# Altium PCB RPI_LP_motor_hat.PcbDoc
Units mm, origin at the board's own origin, x right, y up, seen from the top; angles counter-clockwise.
Board outline 64.99 x 56 mm, 2 copper layers (Top Layer, Bottom Layer); 84 components, 64 nets, 330 pads, 138 vias.
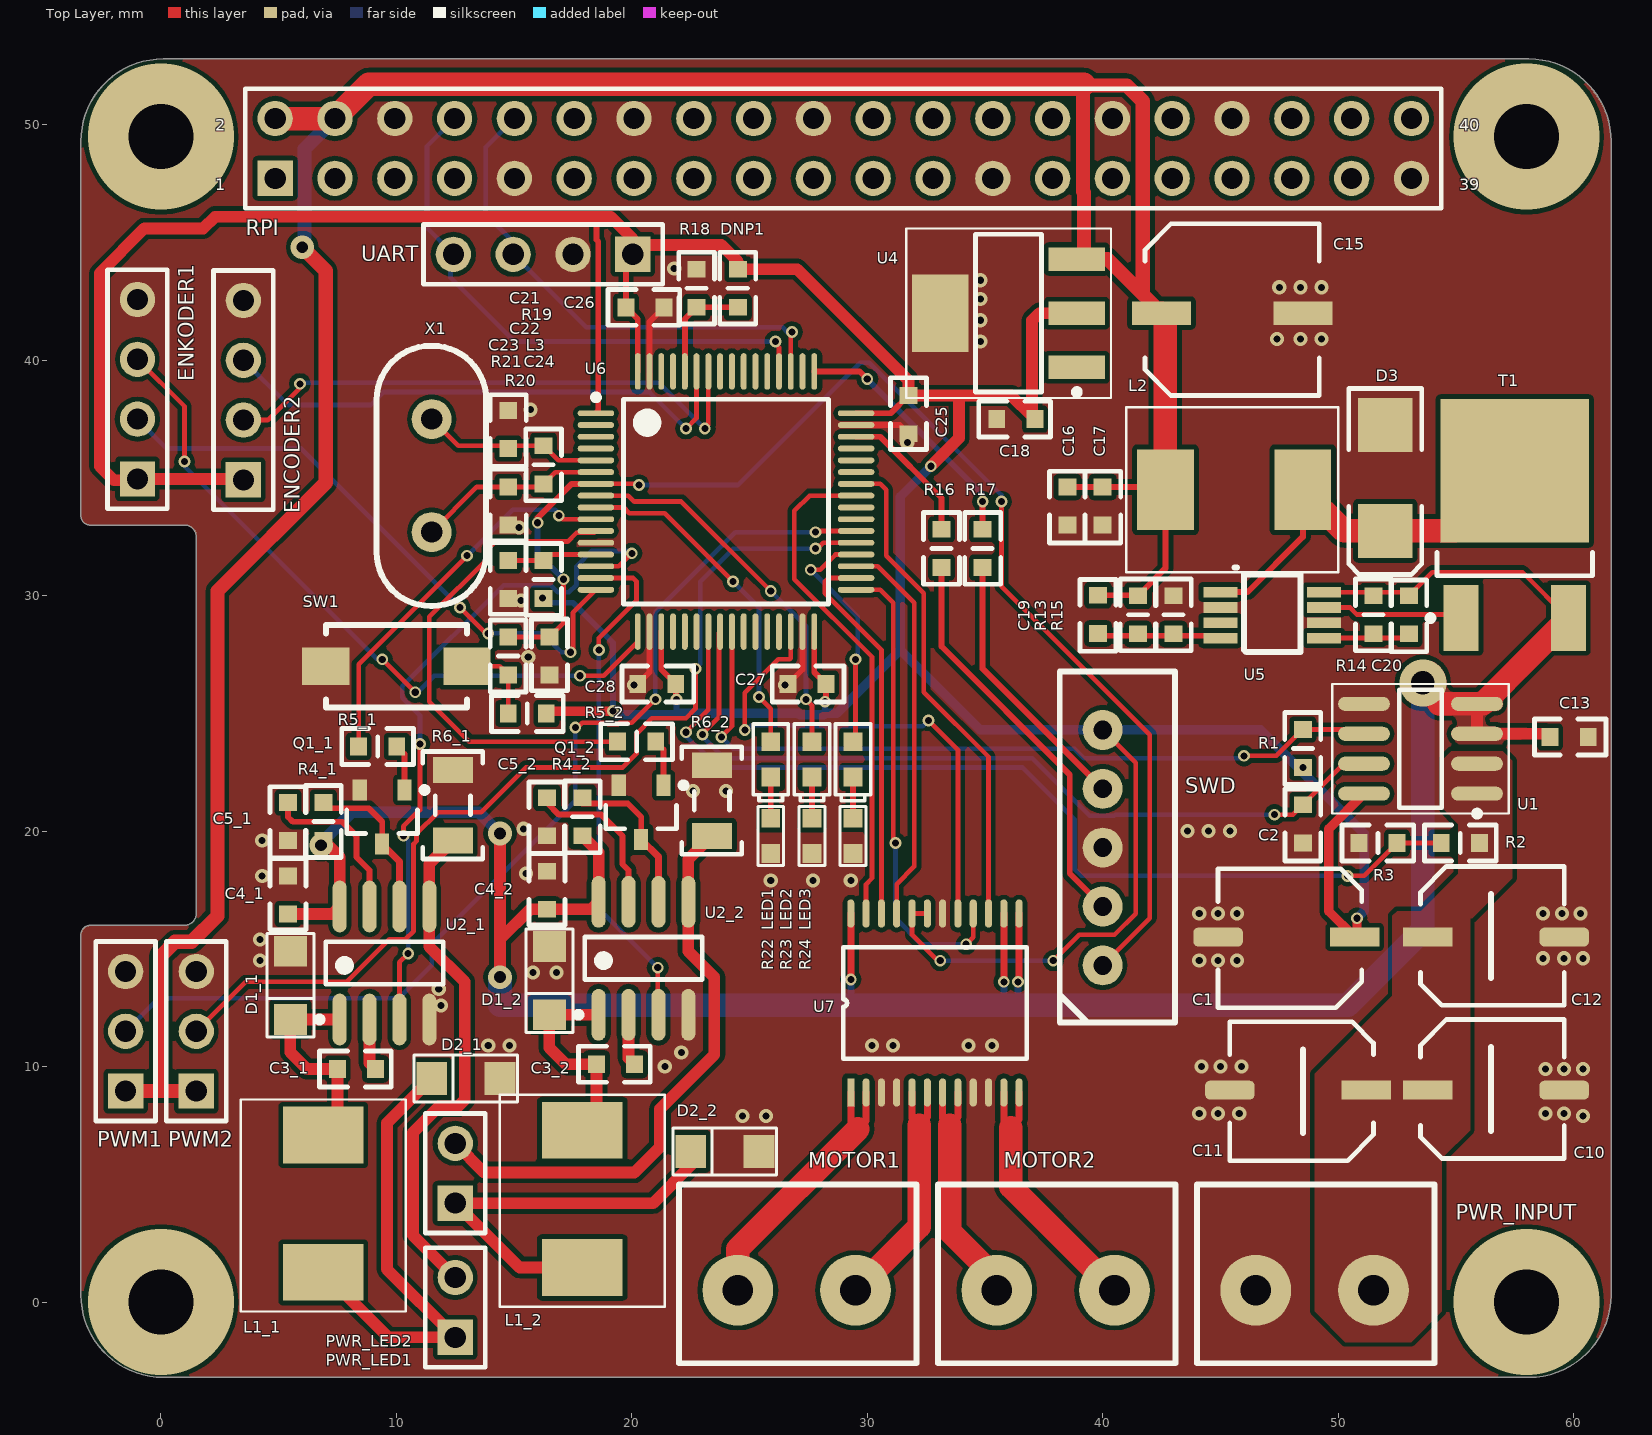
[diagram p0: Top Layer view]
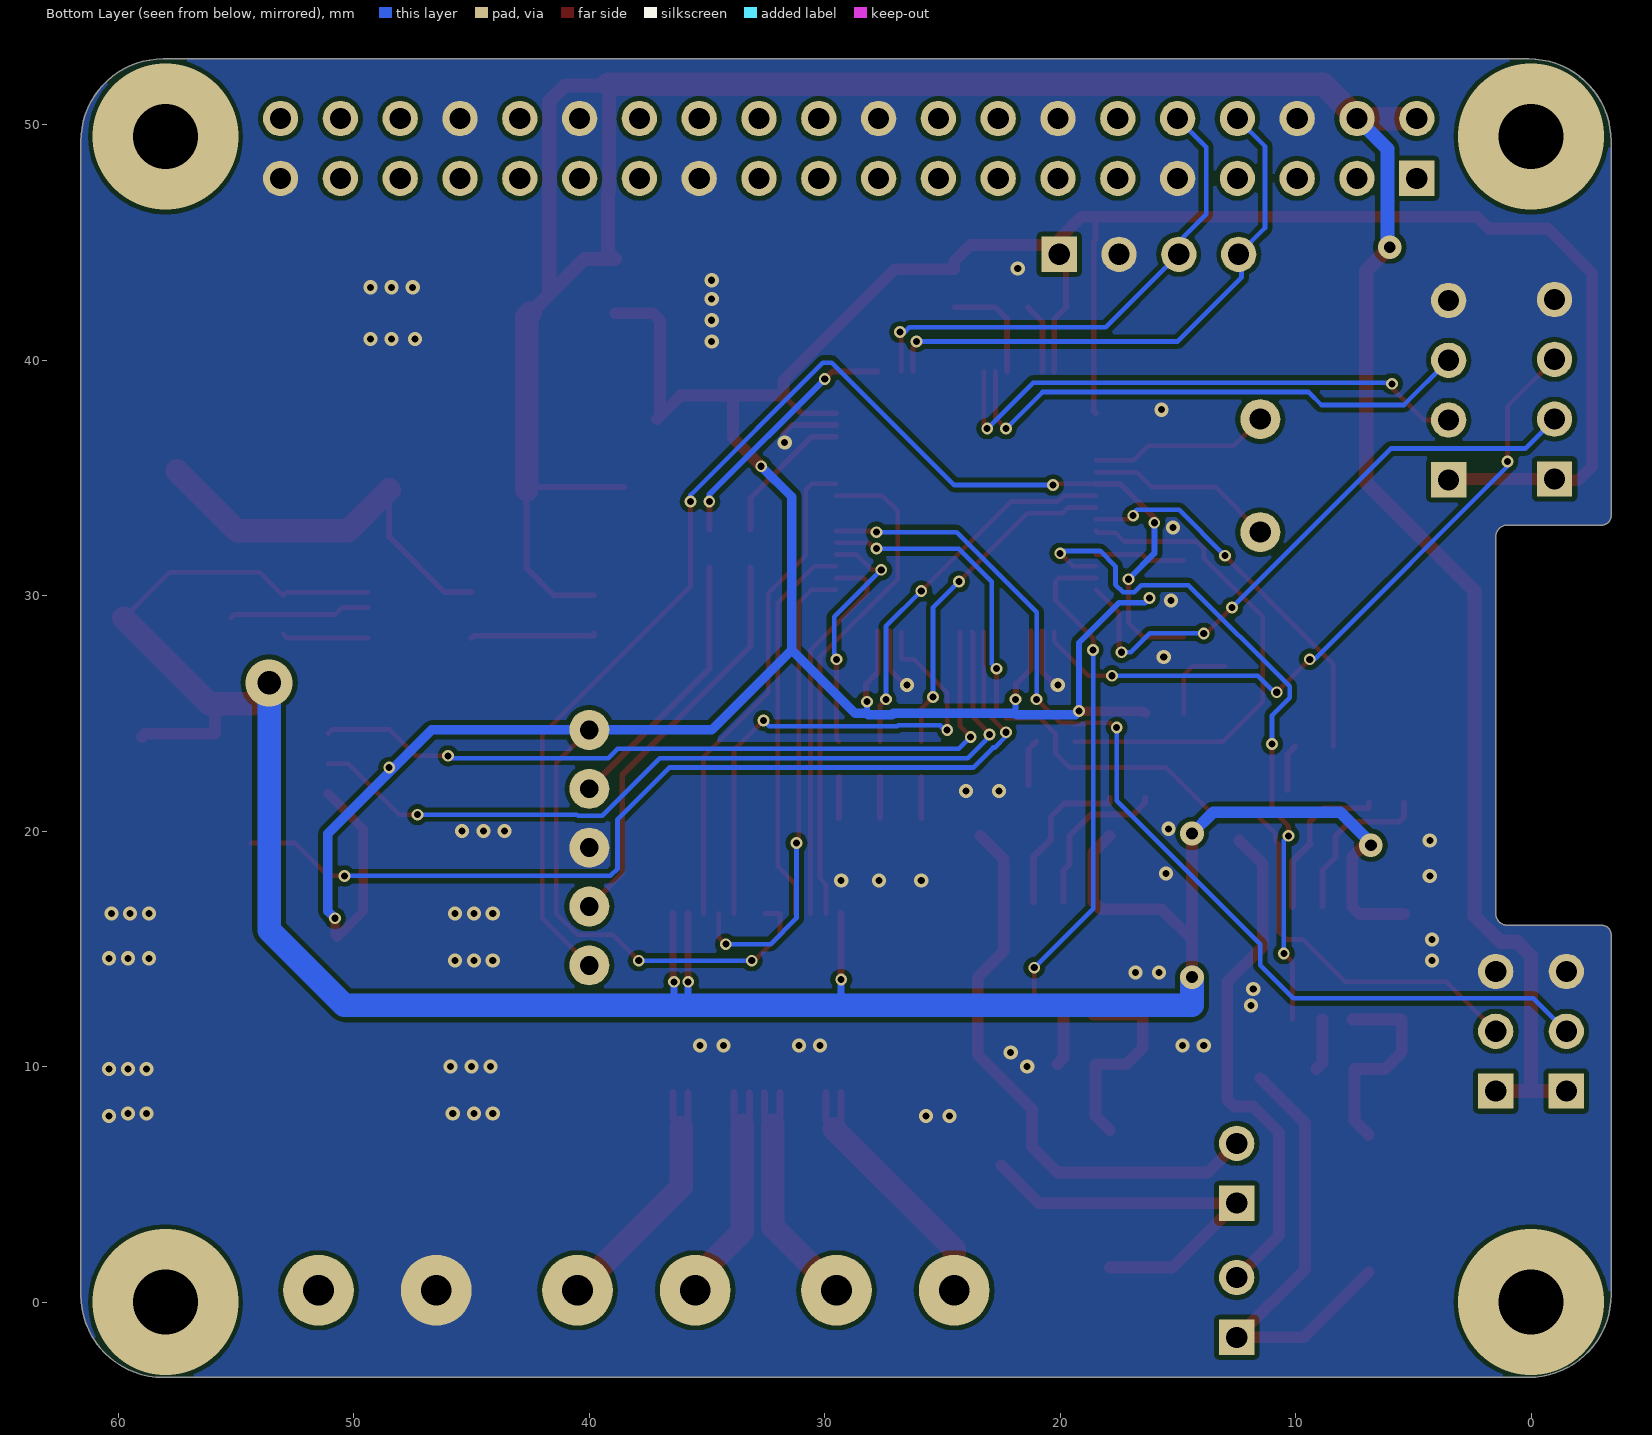
[diagram p1: Bottom Layer view, seen from below]
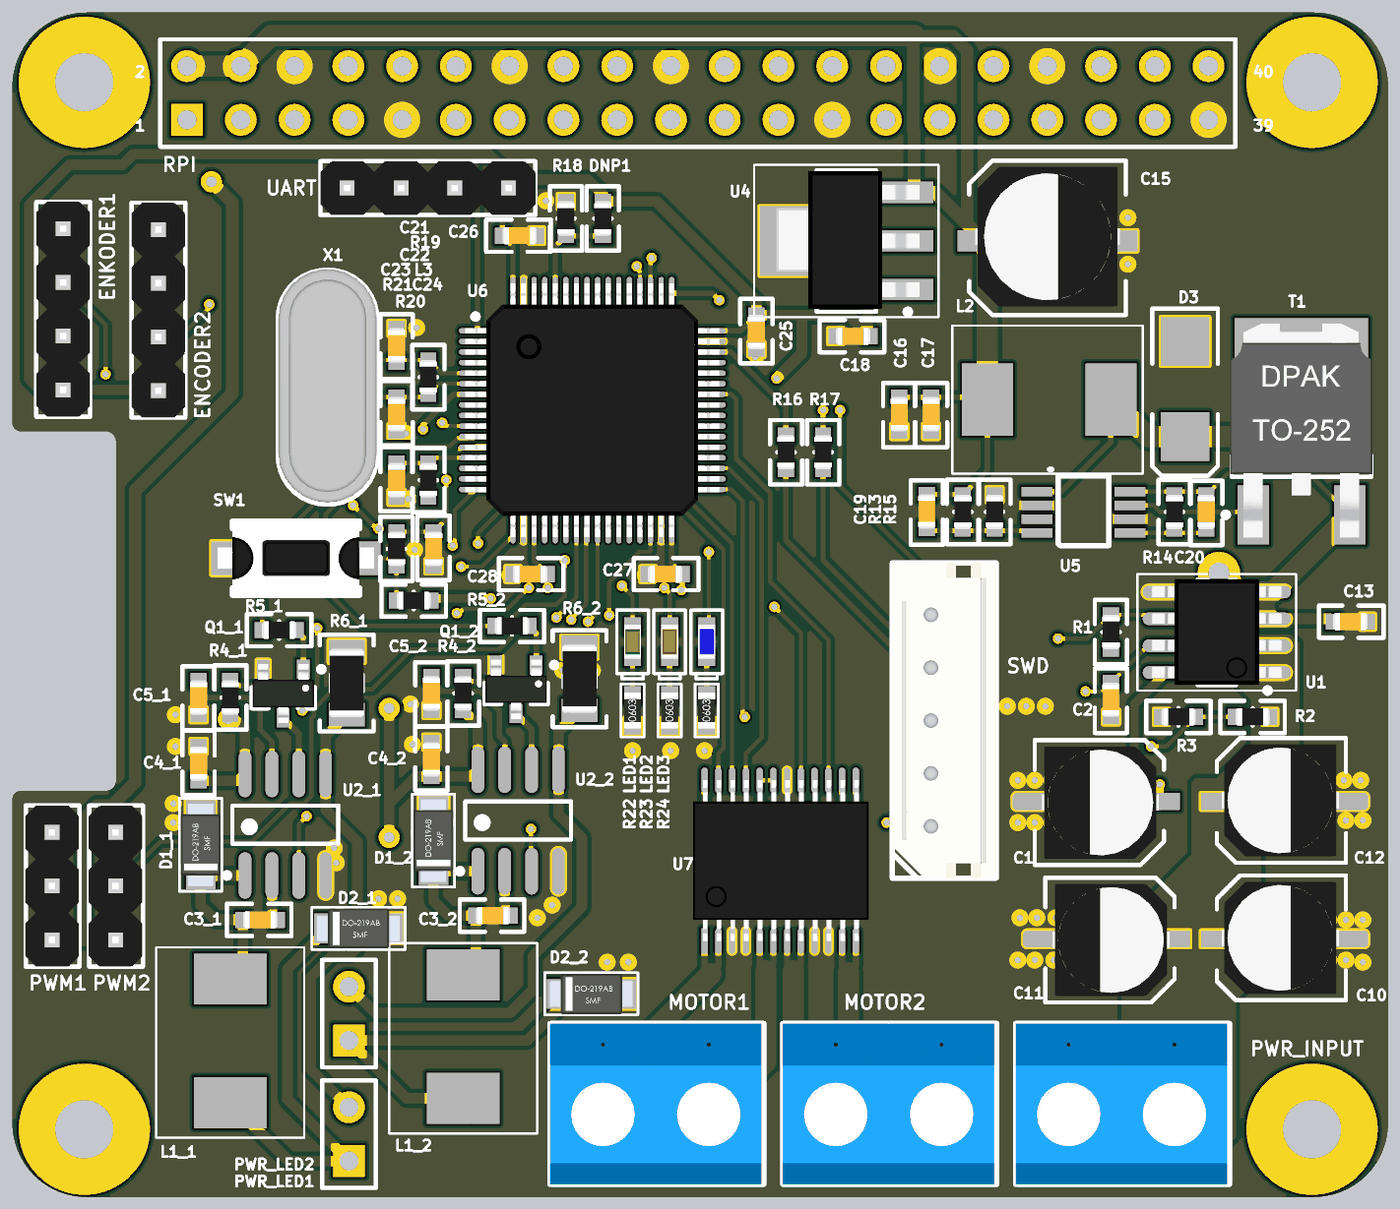
[diagram p2: 3D render of the assembled board from above, using the file's embedded part models]

## Layer stack, top to bottom
Top Solder: solder mask 0.0102, Solder Resist, Dk 3.5
Top Layer: signal copper 0.0356
Dielectric 1: dielectric 0.32, FR-4, Dk 4.8
Bottom Layer: signal copper 0.0356
Bottom Solder: solder mask 0.0102, Solder Resist, Dk 3.5

## Board outline
-3.4,0.3 -3.4,15.6 cw(c-3,15.6) -3,16 1,16 ccw(c1,16.5) 1.5,16.5 1.5,32.5 ccw(c1,32.5) 1,33 -3,33 cw(c-3,33.4) -3.4,33.4 -3.4,49.3 cw(c0.1,49.3) 0.1,52.8 58.1,52.8 cw(c58.096,49.304) 61.592,49.3 61.592,0.3 cw(c58.096,0.296) 58.1,-3.2 0.1,-3.2 cw(c0.1,0.3)

## Design rules (kind name [scope] priority, off if disabled: settings)
Clearance [All] p1: gap=0.2 ignorepadtopadclearanceinfootprint=FALSE
PolygonConnect [All] p1: connectstyle=Direct reliefconductorwidth=0.254 reliefentries=4 polygonreliefangle="90 Angle" airgapwidth=0.2
RoutingVias [All] p1: holewidth=0.3 width=0.5 viastyle="Through Hole" minholewidth=0.3 minwidth=0.5 maxholewidth=1 maxwidth=2
SolderMaskExpansion [All] p1: expansion=0.102
Width [All] p1: maxlimit=4 minlimit=0.2 preferedwidth=0.25
30 further rules are at their usual default settings.

## Classes and differential pairs
component class BMS: C1 C2 R1 R2 R3 U1
component class MCU: C21 C22 C23 C24 C25 C26 C27 C28 DNP1 L3 LED1 LED2 LED3 R16 R17 R18 R19 R20 R21 R22 R23 R24 SW1 SWD U6 X1
component class "motor hat": C10 C11 C12 ENCODER2 ENKODER1 MOTOR1 MOTOR2 PWM1 PWM2 PWR_INPUT RPI U7 UART
component class "power LED 1": C3_1 C4_1 C5_1 D1_1 D2_1 L1_1 PWR_LED1 Q1_1 R4_1 R5_1 R6_1 U2_1
component class "power LED 2": C3_2 C4_2 C5_2 D1_2 D2_2 L1_2 PWR_LED2 Q1_2 R4_2 R5_2 R6_2 U2_2
component class PSU: C13 C15 C16 C17 C18 C19 C20 D3 L2 R13 R14 R15 T1 U4 U5
channel class light: "power LED 1" "power LED 2"

## Components (designator, comment, footprint, x,y, rotation, side; value= is the part's Value field where it differs from the comment)
C1 "47uF 25V" Con_SMD_5x5.5 48,15.5 r270 top
C2 "1nF" 0603_CAP 48.5,19.5 r90 top
C3_1 "100nF 35V" 0603_CAP 7.495,9.9 r0 top (schematic designator C3)
C3_2 "100nF 35V" 0603_CAP 18.495,10.1 r0 top (schematic designator C3)
C4_1 "1uF 35V" 0603_CAP 5.395,18.1 r270 top (schematic designator C4)
C4_2 "1uF 35V" 0603_CAP 16.395,18.3 r270 top (schematic designator C4)
C5_1 "100nF 6,3V" 0603_CAP 5.395,19.6 r90 top (schematic designator C5)
C5_2 "100nF 6,3V" 0603_CAP 16.395,19.8 r90 top (schematic designator C5)
C10 "47uF 25V" "ELECTROLYTIC 5mm" 56.5,9 r90 top
C11 "47uF 25V" "ELECTROLYTIC 5mm" 48.5,9 r270 top
C12 "47uF 25V" "ELECTROLYTIC 5mm" 56.5,15.5 r90 top
C13 "100nF 50V" 0603_CAP 60.62,24 r180 top
C15 "100uF 6.3V" Con_SMD_6.3x5.5 45.5,42 r90 top
C16 "100nF 25V" 0603_CAP 38.5,33 r90 top
C17 "100nF 25V" 0603_CAP 40,33 r90 top
C18 "100nF 25V" 0603_CAP 35.5,37.5 r0 top
C19 "100pF 50V" 0603_CAP 39.8,28.4 r90 top
C20 "100pF 50V" 0603_CAP 53,28.38 r90 top
C21 "10pF 50V" 0603_CAP 14.75,36.25 r90 top
C22 "10pF 50V" 0603_CAP 14.75,34.62 r270 top
C23 "100nF 6,3V" 0603_CAP 14.75,31.5 r270 top
C24 "100nF 6,3V" 0603_CAP 16.5,28.25 r270 top
C25 "100nF 6,3V" 0603_CAP 31.75,38.5 r270 top
C26 "100nF 6,3V" 0603_CAP 19.75,42.25 r0 top
C27 "100nF 6,3V" 0603_CAP 28.25,26.25 r180 top
C28 "100nF 6,3V" 0603_CAP 21.87,26.25 r180 top
D1_1 "part_number" "DO-219AB (SMF)" 5.495,14.9 r90 top (schematic designator D1)
D1_2 "part_number" "DO-219AB (SMF)" 16.495,15.1 r90 top (schematic designator D1)
D2_1 "part_number" "DO-219AB (SMF)" 14.4,9.5 r0 top (schematic designator D2)
D2_2 "part_number" "DO-219AB (SMF)" 25.4,6.4 r0 top (schematic designator D2)
D3 "D Schottky" SMB 52,35 r270 top
DNP1 "10k" 0603 24.5,43.87 r270 top
ENCODER2 "HDR1X4" HDR1X4 3.5,34.92 r90 top (schematic designator P8)
ENKODER1 "HDR1X4" HDR1X4 -1,34.96 r90 top (schematic designator P9)
L1_1 "14uH" PA4341.223ANLT 6.895,7.1 r270 top (schematic designator L1)
L1_2 "14uH" PA4341.223ANLT 17.895,7.3 r270 top (schematic designator L1)
L2 "22uH" PA4341.223ANLT 48.5,34.5 r180 top
L3 "Koralik Ferrytowy" 0603 16.25,29.88 r90 top
LED1 "RED" 0603_led_green 25.9,23.05 r270 top
LED2 "RED" 0603_led_red 27.65,23.05 r270 top
LED3 "RED" 0603_led_blue 29.4,23.05 r270 top
MOTOR1 "ARK2" ARK2 22,-2.6 r0 top (schematic designator CON1)
MOTOR2 "ARK2" ARK2 33,-2.6 r0 top (schematic designator CON2)
PWM1 "HDR1X3" HDR1X3 -1.5,8.96 r90 top (schematic designator P7)
PWM2 "HDR1X3" HDR1X3 1.5,8.96 r90 top (schematic designator P6)
PWR_INPUT "ARK2" ARK2 44,-2.6 r0 top (schematic designator CON3)
PWR_LED1 "HDR1X2" HDR1X2 12.5,-1.5 r90 top (schematic designator P1)
PWR_LED2 "HDR1X2" HDR1X2 12.5,4.2 r90 top (schematic designator P1)
Q1_1 "2N7002" Sot23 9.395,20.6 r270 top (schematic designator Q1)
Q1_2 "2N7002" Sot23 20.395,20.8 r270 top (schematic designator Q1)
R1 "10k" 0603 48.5,24.32 r270 top
R2 "47k" 0603 54.38,19.5 r0 top
R3 "10k" 0603 50.88,19.5 r0 top
R4_1 "65k" 0603 6.895,19.6 r90 top (schematic designator R4)
R4_2 "65k" 0603 17.895,19.8 r90 top (schematic designator R4)
R5_1 "10k" 0603 8.395,23.6 r0 top (schematic designator R5)
R5_2 "10k" 0603 19.395,23.8 r0 top (schematic designator R5)
R6_1 "0,56R" 1206 12.395,21.1 r270 top (schematic designator R6)
R6_2 "0,56R" 1206 23.395,21.3 r270 top (schematic designator R6)
R13 "62k" 0603 41.5,28.38 r90 top
R14 "20k" 0603 51.5,28.38 r90 top
R15 "20k" 0603 43,30 r270 top
R16 "1k" 0603 33.15,31.2 r90 top
R17 "1k" 0603 34.9,31.2 r90 top
R18 "10k" 0603 22.75,42.25 r90 top
R19 "1M" 0603 16.25,34.75 r90 top
R20 "1k" 0603 14.75,25 r0 top
R21 "1k" 0603 14.75,28.25 r270 top
R22 "1k" RES_0603 25.9,19.8 r90 top
R23 "1k" RES_0603 27.65,19.8 r90 top
R24 "1k" RES_0603 29.4,19.8 r90 top
RPI "HDRx20" HDR2x20 4.851,47.727 r0 top (schematic designator RPI1)
SW1 "Micro_Switch" "Tact 34N-F" 7,27 r270 top
SWD "HDR1X5" "Molex SPOX Horizontal 5 Circuits" 40,24.3 r270 top (schematic designator SWD1)
T1 "AOD403" "DPAK TO-252" 57.5,33 r90 top
U1 "ACS711" SO-8_N 53.5,23.5 r180 top
U2_1 "LM3404MA" M08A_N 9.495,14.4 r90 top (schematic designator U2)
U2_2 "LM3404MA" M08A_N 20.495,14.6 r90 top (schematic designator U2)
U4 "LM1117MP-3V3" SOT223 36,42 r180 top
U5 "LM3485" VSSOP8 49.4,29.5 r0 top
U6 "STM32F103RBT6" LQFP64_L 24,34 r0 top
U7 "TB6612FNG" SSOP24-P-300 29.3,8.9 r90 top
UART "HDR1X4" HDR1X4 20.04,44.5 r180 top (schematic designator P4)
X1 "8MHz" HC49-4H_THT 9.163,29.562 r270 top

## Footprints (in the part's own frame and the unit in brackets; to place one, negate y for a bottom-side part, rotate by r counter-clockwise, add the part's x,y. Pads: shape width x height; smd on the part's side, far side on the other; paste and mask are expansions set on the pad)
0603 [mil]
  rect 28x30 smd: 1(0,0) 2(63.78,0)
  silkscreen extent -28,-30 92,30, body extent 0,-16 64,16, height 32
0603_CAP [mil]
  rect 28x30 smd: 1(0,0) 2(63.78,0)
  silkscreen extent -30,-30 90,30, body extent 0,-16 64,16, height 32
0603_led_blue [mm]
  rect 0.8x0.8 smd: 1(-0.75,0) 2(0.75,0)
  silkscreen extent -1.5,-0.75 1.75,0.75, body extent -0.8,-0.4 0.8,0.4, height 0.6
0603_led_green [mm]
  rect 0.8x0.8 smd: 1(-0.75,0) 2(0.75,0)
  silkscreen extent -1.5,-0.75 1.75,0.75, body extent -0.8,-0.4 0.8,0.4, height 0.6
0603_led_red [mm]
  rect 0.8x0.8 smd: 1(-0.75,0) 2(0.75,0)
  silkscreen extent -1.5,-0.75 1.75,0.75, body extent -0.8,-0.4 0.8,0.4, height 0.6
1206 [mm] "3216(metric)"
  rect 1.1x1.7 smd: 1(-1.499,0) 2(1.499,0)
  silkscreen extent -2.29,-1.27 2.29,1.27, body extent -1.61,-0.81 1.61,0.81, height 0.81
ARK2 [mm]
  round 3 hole 1.3: 1(2.5,3.1) 2(7.5,3.1)
  silkscreen extent 0,0 10.1,7.6, body extent 0,0 10,7.6, height 10
Con_SMD_5x5.5 [mm] "SMD electrolytic capacitor"
  rect 0.8x2.1 smd: 1(0,2.7)
  rrect50% 0.8x2.1 smd: 2(0,-3.1)
  silkscreen extent -2.9,-3.1 3,3, body extent -2.6,-2.76 2.7,2.76, height 5.81
Con_SMD_6.3x5.5 [mm] "SMD electrolytical capacitor"
  rect 1x2.5 smd: 1(0,3) 2(0,-3)
  silkscreen extent -3.5,-3.7 3.8,3.7, body extent -3.1,-3.41 3.5,3.41, height 5.91
"DO-219AB (SMF)" [mm]
  rect 1.3x1.4 smd: 1(0,0) 2(-2.9,0)
  silkscreen extent -3.65,-1 0.75,1, body extent -3.4,-0.95 0.5,0.95, height 1.25
"DPAK TO-252" [mm]
  rect 2.8x1.5 smd: 1(-3.95,2.28) 3(-3.95,-2.28)
  rect 6.1x6.3 smd: 2(2.3,0)
  silkscreen extent -4.07,-3.3 -1.15,3.7, body extent -5.02,-3.36 5.08,3.38, height 2.37
"ELECTROLYTIC 5mm" [mm]
  rect 0.8x2.1 smd: 1(0,2.7)
  rrect50% 0.8x2.1 smd: 2(0,-3.1)
  silkscreen extent -2.9,-3.1 3,3, body extent -2.6,-2.76 2.7,2.76, height 5.81
HC49-4H_THT [mm] "HC49-4H package for oscillator"
  round 1.7 hole 0.9: 1(-7.938,2.337) 2(-3.138,2.337)
  silkscreen extent -11.05,0 0,4.65, body extent -11.11,0 -0.06,4.65, height 3.5
HDR1X2 [mm] "Connector; Header; 2 Position"
  rect 1.5x1.5 hole 0.9: 1(0,0)
  round 1.5 hole 0.9: 2(2.54,0)
  silkscreen extent -1.27,-1.27 3.81,1.27
HDR1X3 [mm] "Connector; Header; 3 Position"
  rect 1.5x1.5 hole 0.9: 1(0,0)
  round 1.5 hole 0.9: 2(2.54,0) 3(5.08,0)
  silkscreen extent -1.27,-1.27 6.35,1.27, body extent -1.27,-1.24 6.35,1.3, height 8.54
HDR1X4 [mm] "Connector; Header; 4 Position"
  rect 1.5x1.5 hole 0.9: 1(0,0)
  round 1.5 hole 0.9: 2(2.54,0) 3(5.08,0) 4(7.62,0)
  silkscreen extent -1.27,-1.27 8.89,1.27, body extent -1.27,-1.27 8.89,1.27, height 8.54
HDR2x20 [mm] "Connector; Header; 20x2 Position"
  rect 1.5x1.5 hole 0.9: 1(0,0)
  round 1.5 hole 0.9: 2(0,2.54) 3(2.54,0) 4(2.54,2.54) 5(5.08,0) 6(5.08,2.54) 7(7.62,0) 8(7.62,2.54) 9(10.16,0) 10(10.16,2.54) 11(12.7,0) 12(12.7,2.54) 13(15.24,0) 14(15.24,2.54) 15(17.78,0) 16(17.78,2.54) 17(20.32,0) 18(20.32,2.54) 19(22.86,0) 20(22.86,2.54) 21(25.4,0) 22(25.4,2.54) 23(27.94,0) 24(27.94,2.54) 25(30.48,0) 26(30.48,2.54) 27(33.02,0) 28(33.02,2.54) 29(35.56,0) 30(35.56,2.54) 31(38.1,0) 32(38.1,2.54) 33(40.64,0) 34(40.64,2.54) 35(43.18,0) 36(43.18,2.54) 37(45.72,0) 38(45.72,2.54) 39(48.26,0) 40(48.26,2.54)
  silkscreen extent -1.27,-1.27 49.53,3.81
LQFP64_L [mm] "Thin QFP, 64-Leads, Body 10x10mm, Pitch 0.5mm, IPC High Density"
  oval 1.55x0.25 smd: 1(-5.525,3.75) 2(-5.525,3.25) 3(-5.525,2.75) 4(-5.525,2.25) 5(-5.525,1.75) 6(-5.525,1.25) 7(-5.525,0.75) 8(-5.525,0.25) 9(-5.525,-0.25) 10(-5.525,-0.75) 11(-5.525,-1.25) 12(-5.525,-1.75) 13(-5.525,-2.25) 14(-5.525,-2.75) 15(-5.525,-3.25) 16(-5.525,-3.75) 33(5.525,-3.75) 34(5.525,-3.25) 35(5.525,-2.75) 36(5.525,-2.25) 37(5.525,-1.75) 38(5.525,-1.25) 39(5.525,-0.75) 40(5.525,-0.25) 41(5.525,0.25) 42(5.525,0.75) 43(5.525,1.25) 44(5.525,1.75) 45(5.525,2.25) 46(5.525,2.75) 47(5.525,3.25) 48(5.525,3.75)
  oval 0.25x1.55 smd: 17(-3.75,-5.525) 18(-3.25,-5.525) 19(-2.75,-5.525) 20(-2.25,-5.525) 21(-1.75,-5.525) 22(-1.25,-5.525) 23(-0.75,-5.525) 24(-0.25,-5.525) 25(0.25,-5.525) 26(0.75,-5.525) 27(1.25,-5.525) 28(1.75,-5.525) 29(2.25,-5.525) 30(2.75,-5.525) 31(3.25,-5.525) 32(3.75,-5.525) 49(3.75,5.525) 50(3.25,5.525) 51(2.75,5.525) 52(2.25,5.525) 53(1.75,5.525) 54(1.25,5.525) 55(0.75,5.525) 56(0.25,5.525) 57(-0.25,5.525) 58(-0.75,5.525) 59(-1.25,5.525) 60(-1.75,5.525) 61(-2.25,5.525) 62(-2.75,5.525) 63(-3.25,5.525) 64(-3.75,5.525)
  silkscreen extent -5.65,-4.35 4.35,4.55, body extent -6,-6 6,6, height 1.4
M08A_N [mm] "SOIC, 8-Leads, Body 4.9x3.9mm, Pitch 1.27mm, IPC Medium Density"
  oval 2.2x0.6 smd: 1(-2.4,1.905) 2(-2.4,0.635) 3(-2.4,-0.635) 4(-2.4,-1.905) 5(2.4,-1.905) 6(2.4,-0.635) 7(2.4,0.635) 8(2.4,1.905)
  silkscreen extent -2.52,-2.5 0.9,2.88, body extent -2,-2.5 2,2.5, height 1.75
"Molex SPOX Horizontal 5 Circuits" [mm]
  round 1.7 hole 0.8: 1(0,0) 2(2.5,0) 3(5,0) 4(7.5,0) 5(10,0)
  silkscreen extent -2.47,-1.83 12.42,3.08, body extent -2.47,-1.83 12.42,3.08, height 5.9
PA4341.223ANLT [mil]
  rect 95x135 smd: 1(0,0) 2(229.88,0)
  silkscreen extent -59,-138 295,138, body extent -9,-127 245,127, height 118
RES_0603 [mm]
  rect 0.8x0.8 smd: 1(-0.75,0) 2(0.75,0)
  silkscreen extent -1.25,-0.55 1.25,0.55, body extent -0.85,-0.4 0.85,0.4, height 0.56
SMB [mm] "DO-214-AA/SMB; 2 C-Bend Leads; Body 5.3 x 3.6 mm, inc. leads (LxW)"
  rect 2.3x2.3 smd: 1(-2.25,0) 2(2.25,0)
  silkscreen extent -3.8,-1.55 4.1,1.55
SO-8_N [mm]
  oval 2.2x0.6 smd: 1(-2.4,1.905) 2(-2.4,0.635) 3(-2.4,-0.635) 4(-2.4,-1.905) 5(2.4,-1.905) 6(2.4,-0.635) 7(2.4,0.635) 8(2.4,1.905)
  silkscreen extent -3.75,-2.75 3.75,2.88, body extent -3.1,-2.51 3.1,2.49, height 1.75
Sot23 [mm]
  rect 0.9x0.6 smd: 1(-1.15,0.95) 2(1.15,0) 3(-1.15,-0.95)
  silkscreen extent -1.27,-1.5 0.7,1.93, body extent -1.4,-1.45 1.4,1.45, height 1.3
SOT223 [mm]
  rect 2.4x1 smd: 1(-2.9,2.3) 2(-2.9,0) 3(-2.9,-2.3)
  rect 2.4x3.3 smd: 4(2.9,0)
  silkscreen extent -4.35,-3.6 4.35,3.6, body extent -3.45,-3.3 3.3,3.2, height 1.8
SSOP24-P-300 [mm]
  rect 1.2x0.3 smd: 1(0,0)
  oval 1.2x0.3 smd: 2(0,-0.65) 3(0,-1.3) 4(0,-1.95) 5(0,-2.6) 6(0,-3.25) 7(0,-3.9) 8(0,-4.55) 9(0,-5.2) 10(0,-5.85) 11(0,-6.5) 12(0,-7.15) 13(7.6,-7.15) 14(7.6,-6.5) 15(7.6,-5.85) 16(7.6,-5.2) 17(7.6,-4.55) 18(7.6,-3.9) 19(7.6,-3.25) 20(7.6,-2.6) 21(7.6,-1.95) 22(7.6,-1.3) 23(7.6,-0.65) 24(7.6,0)
  silkscreen extent 1.43,-7.48 6.17,0.33, body extent 0,-7.75 7.6,0.55, height 1.6
"Tact 34N-F" [mm]
  rect 1.6x2 smd: 1(0,0) 2(0,6)
  silkscreen extent -1.75,0 1.75,6, body extent -1.75,-0.7 1.75,6.7, height 4.2
VSSOP8 [mm]
  rect 1.45x0.45 smd: 1(-4.4,0.65) 2(-4.4,0) 3(-4.4,-0.65) 4(-4.4,-1.3) 5(0,-1.3) 6(0,-0.65) 7(0,0) 8(0,0.65)
  silkscreen extent -3.8,-1.9 -1,1.7, body extent -3.4,-1.9 -1,1.4, height 1

## Part data
C1 C15: library part Cap_Pol, "Polar capacitor"
C2 C3_1 C3_2 C4_1 C4_2 C5_1 C5_2 C13 C16 C17 C18 C19 C20 C21 C22 C23 C24 C25 C26 C27 C28: library part Cap, "Ceramic capacitor"
C10 C11 C12: library part Electrolytic, "Electrolytic capacitor"
D1_1 D1_2 D2_1 D2_2: library part Schottky, "schottky", part_number=part_number
D3: "Schottky Diode", Code_JEDEC=DO-214-AA, LatestRevisionDate=17-Jul-2002, LatestRevisionNote="Re-released for DXP Platform.", PackageDescription="DO-214-AA/SMB; 2 C-Bend Leads; Body 5.3 x 3.6 mm, inc. leads (LxW)", PackageReference=SMB, Published=8-Jun-2000, Publisher="Altium Limited"
DNP1 L3 R1 R2 R3 R4_1 R4_2 R5_1 R5_2 R6_1 R6_2 R13 R14 R15 R16 R17 R18 R19 R20 R21: library part RES, "Resistior"
ENCODER2 ENKODER1 UART: "Header, 4-Pin", LatestRevisionDate=17-Jul-2002, LatestRevisionNote="Re-released for DXP Platform.", Publisher="Altium Limited"
L1_1 L1_2 L2: library part Inductor
LED1 LED2 LED3: library part LED, "Light-emitting diode", Color=RED
MOTOR1 MOTOR2 PWR_INPUT: "Z³¹cze œrubowe 2 piny"
PWM1 PWM2: "Header, 3-Pin", LatestRevisionDate=17-Jul-2002, LatestRevisionNote="Re-released for DXP Platform.", Publisher="Altium Limited"
PWR_LED1 PWR_LED2: "Header, 2-Pin", LatestRevisionDate=17-Jul-2002, LatestRevisionNote="Re-released for DXP Platform.", Publisher="Altium Limited"
R22 R23 R24: library part Resistor, "Default resistor"
SW1: "Switch", LatestRevisionDate=17-Jul-2002, LatestRevisionNote="Re-released for DXP Platform.", PackageReference=SPST-2, Published=24-Mar-1999, Publisher="Altium Limited"
SWD: "Header, 5-Pin", LatestRevisionDate=17-Jul-2002, LatestRevisionNote="Re-released for DXP Platform.", Publisher="Altium Limited"
T1: library part p-mosfet, "AEC Generic p-mosfet", part_number=AOD403
U1: "Current sensor. 12.5A or 25A at 3.3V", HelpURL=C:\Users\micha\Documents\Studia\In¿ynierka\Elektronika\Datasheets\ACS711.pdf
U2_1 U2_2: "1.0A Constant Current Buck Regulator for High Power LED Drivers, 8-pin Narrow SOIC", Manufacturer="National Semiconductor", PackageTopMarking=NSZXTT*L3404*MA, PowerWise=Y, Code_IPC=SOIC127P600-8, Code_JEDEC=MS-012-AA, ComponentLink1Description="Manufacturer URL", ComponentLink1URL=http://www.national.com/, ComponentLink2Description="LM3404 Datasheet", ComponentLink2URL=http://www.national.com/ds/LM/LM3404.pdf, ComponentLink3Description="LM3404 Web Page", ComponentLink3URL=http://www.national.com/pf/LM/LM3404.html, ComponentLink4Description="M08A Package Page", ComponentLink4URL=http://www.national.com/packaging/folders/m08a.html, CompType=MiscPower, DatasheetVersion=Feb-2010, HelpURL=C:\Users\micha\Documents\Studia\In¿ynierka\Elektronika\Datasheets\LM3404.pdf, High-Reliability=Y, PackageDescription="SOIC Narrow, 4.9 x 3.9 x 1.45mm, 8 Lead, 1.27mm Pitch", PackageReference=M08A, PackageVersion="revM, May-2009", PartNumber=LM3404MA, PinCount=8, RoHS=N
U4: "800mA Low-Dropout Linear Regulator", DigiKeyPartNumber=LM1117MP-3.3CT-ND, Manufacturer="National Semiconductor", PackageTopMarking=XYTT*N05A, PartNumber=LM1117MP-3.3, PowerWise=N, Code_IPC=SOT223-4, Code_JEDEC=TO-261-AA, ComponentLink1Description="LM1117 Datasheet", ComponentLink1URL=http://www.national.com/ds/LM/LM1117.pdf, ComponentLink2Description="LM1117 Web Page", ComponentLink2URL=http://www.national.com/pf/LM/LM1117.html, ComponentLink3Description="MP04A Package Page", ComponentLink3URL=http://www.national.com/packaging/folders/mp04a.html, CompType="LDO IC", DatasheetVersion=Apr-2006, PackageDescription="Molded SOT-223, 6.50 x 3.56 x 1.6mm Body, 4 Lead, 2.3mm Pitch", PackageReference=MP04A, PackageVersion="revB, Apr-2003", PinCount=4, Published=4-Dec-2008, Publisher="Altium Limited", RoHS=O
U6: "STM32 ARM-based 32-bit", ComponentLink1Description="Manufacturer Link", ComponentLink1URL=www.st.com/stm32, ComponentLink2Description=Datasheet, ComponentLink2URL=http://www.st.com/stonline/products/literature/ds/13587.pdf, DatasheetVersion="rev6, Mar-2008", PackageDescription="64-Pin Low-Profile Quad Flat Pack, 10 x 10 mm Body, 0.5 mm Pitch (LQFP64)", PackageReference=LQFP64, PackageVersion=Mar-2008, Published=30-May-2008, Publisher="Altium Limited"
U7: "Driver IC for Dual DC motor"
X1: library part XTAL, "Oscillator"
U5: HelpURL=C:\Users\micha\Documents\Studia\In¿ynierka\Elektronika\Datasheets\LM3485.pdf

## Via types
v1: diameter 0.6, hole 0.3, Top Layer to Bottom Layer, 70 vias
v2: diameter 0.5, hole 0.3, Top Layer to Bottom Layer, 59 vias
v3: diameter 6.2, hole 2.75, Top Layer to Bottom Layer, 4 vias
v4: diameter 1, hole 0.5, Top Layer to Bottom Layer, 4 vias
v5: diameter 2, hole 1, Top Layer to Bottom Layer, 1 vias

## Nets (pads, with @x,y where several pads share a name; then routed paths per layer and width w, separated by ;. In a path a pad name is that pad's centre, name@x,y a point inside that pad or via, vN(x,y) a via of type N, cw(c..) or ccw(c..) an arc to the next point about the centre after c; other vN are vias at no path point)
3V3: C1.1 C18.2 C25.1 C26.1 C27.1 C28.1 DNP1.1 ENCODER2.1 ENKODER1.1 L3.1 R1.2 R20.2 SWD.1 U1.8 U4.2 U6.1 U6.19 U6.32 U6.48 U6.64 U7.19 U7.20 UART.1 | length 180
  Top Layer w0.2: U7.19 U7.20 31.9,15.6 33,14.5 v2(33.1,14.5) ; v2@38,14.6 39,15.6 40.5,15.6 41.4,16.5 41.4,22.9 SWD.1
  Top Layer w0.25: U6.1 18.575,37.85 18.575,45.045 18.5,45.12 18.5,46.1 ; UART.1 19.75,44.21 C26.1 20.25,41.75 U6.64 ; U6.19 21.25,26.87 C28.1 21.87,25.63 v2(21.9,25.6) ; U6.32 27.75,26.75 C27.1 28.25,25.55 v2(28.2,25.5) ; U6.48 31,37.75 C25.1
  Top Layer w0.4: R20.2 16.47,25.1 v2(19.2,25.1) ; v2(50.8,16.3) 50.8,15.6 C1.1 49.6,16.6 49.6,20.095 U1.8
  Top Layer w0.5: ENCODER2.1 3.46,34.96 ENKODER1.1 -1.06,34.9 -2,34.9 -2.6,35.5 -2.6,43.7 -0.7,45.6 1.8,45.6 2.3,46.1 18.5,46.1 19.1,46.1 20.04,45.16 UART.1 20.44,44.9 23.8,44.9 24.5,44.2 DNP1.1 27.03,43.87 31.75,39.15 C25.1 33.9,38.5 ; v2(32.7,35.5) 33.9,36.7 33.9,38.5 ; C18.2 C18.2@37,37.62 ; U4.2 37.3,42 37,41.7 C18.2@37,37.62 ; 33.9,38.5 36.12,38.5 C18.2@37,37.62
  Bottom Layer w0.2: v2(33.1,14.5) v2(37.9,14.5)
  Bottom Layer w0.25: v2(16.2,29.9) 16.4,29.7 17.5,29.7 19.2,28 v2(19.2,25.1) ; 21.9,25 v2(21.9,25.6) ; 28.2,25 v2(28.2,25.5)
  Bottom Layer w0.4: v2(19.2,25.1) 19.35,24.95 21.85,24.95 21.9,25 27.081,25 27.131,24.95 28.15,24.95 28.2,25 28.7,25 31.4,27.7 ; v2(32.7,35.5) 31.4,34.2 31.4,27.7 ; v2(50.8,16.3) 51.1,16.6 51.1,19.9 46.7,24.3 SWD.1 34.8,24.3 31.4,27.7
  other v2: 48.5,22.7
5V: C15.1 C16.2 C17.2 C19.2 L2.2 PWM1.1 PWM2.1 R13.2 RPI.2 RPI.4 U4.3 | length 125.2
  Top Layer w0.25: C16.2 C17.2 42.541,34.62 L2.2 42.661,31.161 R13.2 41.48,30.02 C19.2
  Top Layer w0.6: PWM1.1 0,8.96 ; PWM2.1 0,8.96 ; v4(6,44.8) 7,43.8 7,34.8 2.4,30.2 2.4,16.4 1.3,15.3 0.6,15.3 0,14.7 0,8.96 ; 39.2,51.717 39.161,51.678 ; C15.1 41.661,42.839 ; 39.161,51.678 39.161,47.17 39.2,47.132 39.2,44.6 U4.3 40.2,44.3 41.661,42.839 ; 39.161,51.678 41.022,51.678 41.7,51 41.7,42.877 41.661,42.839
  Top Layer w1: RPI.2 RPI.4 7.391,50.291 8.817,51.717 39.2,51.717 ; C15.1 42.661,41.839 L2.2
  Bottom Layer w0.6: v4(6,44.8) 6.101,44.901 6.101,48.977 RPI.4
DC_LINK: C4_1.2 C4_2.2 C13.2 C20.2 R4_1.1 R4_2.1 R14.2 T1.3 U1.3 U1.4 U2_1.8 U2_2.8 U5.8 U7.13 U7.14 U7.24 | length 115.2
  Top Layer w0.2: U5.8 52.85,30.15 C20.2 54,31 57.83,31 T1.3
  Top Layer w0.3: v2(29.3,13.7) U7.24 ; v2(35.8,13.6) U7.14 ; v2(36.4,13.6) 36.4,13.5 36.45,13.55 U7.13
  Top Layer w0.5: C4_1.2 7.27,16.48 U2_1.8 7.59,18.905 R4_1.1@6.947,19.548 ; v4(14.4,13.8) 14.4,15.4 ; v4(14.4,19.9) 14.4,15.4 ; R4_2.1 18.59,19.105 U2_2.8 18.27,16.68 C4_2.2 15.68,16.68 14.4,15.4 ; U1.4 U1.3 58.865,24.135 C13.2
  Top Layer w1: 54.295,25.405 U1.4 56.135,25.405 T1.3
  Bottom Layer w0.3: 29.3,12.6 v2(29.3,13.7) ; 35.8,12.6 v2(35.8,13.6) ; 36.4,12.6 v2(36.4,13.6)
  Bottom Layer w0.5: v4(6.8,19.4) 6.8,19.5 8.1,20.8 13.5,20.8 v4(14.4,19.9)
  Bottom Layer w1: v4(14.4,13.8) 14.4,12.6 29.3,12.6 35.8,12.6 36.4,12.6 50.4,12.6 53.6,15.8 v5(53.6,26.3)
DIR1A: U6.34 U7.22 | length 16.5
  Top Layer w0.2: U6.34 28.35,30.75 28.2,30.6 28.2,30.1 30.6,27.7 U7.22
DIR1B: U6.35 U7.21 | length 16.6
  Top Layer w0.2: U6.35 30.45,31.25 32,29.7 32,18.5 31.25,17.75 U7.21
DIR2A: U6.30 U7.17 | length 22.5
  Top Layer w0.2: v2(24.8,24.3) 24.8,25.878 26.222,27.3 26.7,27.3 26.75,27.35 U6.30 ; v2(32.6,24.7) 32.5,24.8 33.85,23.45 U7.17
  Bottom Layer w0.2: v2(24.8,24.3) 24.7,24.4 25,24.4 25.1,24.5 26.874,24.5 26.924,24.45 32.35,24.45 v2(32.6,24.7)
DIR2B: U6.33 U7.16 | length 20.2
  Top Layer w0.2: U6.33 30.55,30.25 31.1,29.7 31.1,19.5 v2(31.2,19.5) ; v2(34.2,15.2) 34.5,15.5 U7.16
  Bottom Layer w0.2: v2(31.2,19.5) 31.2,16.3 32.3,15.2 v2(34.2,15.2)
GND: C1.2 C2.1 C4_1.1 C4_2.1 C5_1.1 C5_2.1 C10.2 C11.2 C12.2 C13.1 C15.2 C16.1 C17.1 C18.1 C21.2 C22.2 C23.2 C24.2 C25.2 C26.2 C27.2 C28.2 D1_1.1 D1_2.1 D2_1.1 D2_2.1 D3.1 ENCODER2.4 ENKODER1.4 PWM1.3 PWM2.3 PWR_INPUT.1 Q1_1.3 Q1_2.3 R3.1 R6_1.1 R6_2.1 R15.1 R18.2 R22.1 R23.1 R24.1 RPI.6 RPI.9 RPI.14 RPI.20 RPI.25 RPI.30 RPI.34 RPI.39 SW1.1 SWD.3 U1.5 U2_1.4 U2_2.4 U4.4 U5.2 U5.6 U6.12 U6.18 U6.31 U6.47 U6.63 U7.3 U7.4 U7.9 U7.10 U7.18 UART.2 | length 10.3
  Top Layer w0.25: C28.2 20.75,26.75 U6.18 ; U6.63 20.75,41.63 C26.2 ; C27.2 27.25,26.87 U6.31 ; U6.47 31.38,37.25 C25.2
  other v1: 24.7,7.9 25.7,7.9 60.4,7.9 44.1,8 44.9,8 45.8,8 58.8,8 59.6,8 58.8,9.9 59.6,9.9 60.4,9.9 21.4,10 44.2,10 45,10 45.9,10 22.1,10.6 13.9,10.9 14.8,10.9 30.2,10.9 31.1,10.9 34.3,10.9 35.3,10.9 11.9,12.6 11.8,13.3 15.8,14 16.8,14 4.2,14.5 44.1,14.5 44.9,14.5 45.7,14.5 58.7,14.6 59.6,14.6 60.4,14.6 4.2,15.4 44.1,16.5 44.9,16.5 45.7,16.5 58.7,16.5 59.5,16.5 60.3,16.5 25.9,17.9 27.7,17.9 29.3,17.9 4.3,18.1 15.5,18.2 4.3,19.6 43.6,20 44.5,20 45.4,20 15.4,20.1 22.6,21.7 24,21.7 20.1,26.2 26.5,26.2 15.6,27.4 15.3,29.8 15.2,32.9 31.7,36.5 15.7,37.9 34.8,40.8 47.4,40.9 48.4,40.9 49.3,40.9 34.8,41.7 34.8,42.6 47.5,43.1 48.4,43.1 49.3,43.1 34.8,43.4 21.8,43.9
NetC2_2: C2.2 U1.7 U6.24 | length 35.2
  Top Layer w0.2: v2(23,24.1) 23,24.143 23.7,24.843 23.7,28.425 U6.24 ; v2(47.3,20.7) 48.08,20.7 C2.2 50.245,22.865 U1.7
  Bottom Layer w0.2: v2(23,24.1) 23,24.022 23.922,23.1 37,23.1 39.45,20.65 40.476,20.65 40.526,20.7 v2(47.3,20.7)
"NetC3_power LED 1_1": C3_1.1 D1_1.2 L1_1.1 U2_1.1 | length 8.8
  Top Layer w0.5: L1_1.1 7.495,7.7 C3_1.1 6.2,9.9 5.495,10.605 D1_1.2 U2_1.1
"NetC3_power LED 1_2": C3_1.2 U2_1.2 | length 2.2
  Top Layer w0.5: U2_1.2 8.86,10.155 C3_1.2
"NetC3_power LED 2_1": C3_2.1 D1_2.2 L1_2.1 U2_2.1 | length 8.8
  Top Layer w0.5: L1_2.1 18.495,7.9 C3_2.1 17.2,10.1 16.495,10.805 D1_2.2 U2_2.1
"NetC3_power LED 2_2": C3_2.2 U2_2.2 | length 2.2
  Top Layer w0.5: U2_2.2 19.86,10.355 C3_2.2
"NetC5_power LED 1_2": C5_1.2 U2_1.7 | length 7.1
  Top Layer w0.25: C5_1.2 5.395,20.605 5.6,20.4 7.7,20.4 8.3,19.8 8.3,18.9 8.86,18.34 U2_1.7
"NetC5_power LED 2_2": C5_2.2 U2_2.7 | length 6.9
  Top Layer w0.25: C5_2.2 16.395,21.205 16.9,20.7 18.7,20.7 19.6,19.8 19.6,18.6 19.86,18.34 U2_2.7
NetC10_1: C10.1 C11.1 C12.1 PWR_INPUT.2 R2.2 U1.1 U1.2
NetC19_1: C19.1 R13.1 R15.2 U5.4 | length 5.3
  Top Layer w0.25: C19.1 39.8,28.3 44.9,28.3 U5.4
NetC20_1: C20.1 R14.1 U5.5 | length 3.7
  Top Layer w0.2: U5.5 52.82,28.2 C20.1
NetC23_1: C23.1 L3.2 U6.13 | length 3.8
  Top Layer w0.2: C23.1 L3.2 16.5,31.75 U6.13
NetCON1_1: MOTOR1.1 U7.1 U7.2 | length 12.3
  Top Layer w0.3: U7.1 29.3,7.65 29.6,7.35 29.95,7.7 U7.2
  Top Layer w1: MOTOR1.1 24.5,2.25 29.6,7.35
NetCON1_2: MOTOR1.2 U7.5 U7.6 | length 11.2
  Top Layer w0.3: U7.5 31.9,7.8 32.2,7.5 32.55,7.85 U7.6
  Top Layer w1: MOTOR1.2 32.2,3.2 32.2,7.5
NetCON2_1: MOTOR2.1 U7.7 U7.8 | length 10.9
  Top Layer w0.3: U7.7 33.2,7.8 33.5,7.5 33.85,7.85 U7.8
  Top Layer w1: 33.5,7.5 33.5,3 35.5,1 MOTOR2.1
NetCON2_2: MOTOR2.2 U7.11 U7.12 | length 12
  Top Layer w0.3: U7.11 35.8,7.7 36.1,7.4 36.45,7.75 U7.12
  Top Layer w1: 36.1,7.4 36.1,4.9 MOTOR2.2
"NetD2_power LED 1_2": D2_1.2 L1_1.2 PWR_LED1.1 | length 19.7
  Top Layer w0.5: L1_1.2 9.656,-1.5 PWR_LED1.1 9.6,1.4 9.6,7.6 D2_1.2
"NetD2_power LED 2_2": D2_2.2 L1_2.2 PWR_LED2.1 | length 17.2
  Top Layer w0.5: L1_2.2 15.239,1.461 PWR_LED2.1 20.9,4.2 D2_2.2@22.5,5.8
NetD3_2: D3.2 L2.1 T1.2 U5.1 | length 17.3
  Top Layer w0.25: U5.1 46.15,30.15 48.5,32.5 L2.1
  Top Layer w1: L2.1 50.25,32.75 D3.2 54.95,32.75 T1.2
NetDNP1_2: DNP1.2 R18.1 U6.60 | length 4.7
  Top Layer w0.25: U6.60 22.25,41.75 R18.1 DNP1.2
NetLED1_1: LED1.1 U6.9 | length 14.6
  Top Layer w0.2: U6.9 19.65,33.75 19.9,33.5 21.4,33.5 v2(24.3,30.6) ; v2(25.4,25.7) 25.9,25.2 LED1.1
  Bottom Layer w0.2: v2(24.3,30.6) 25.4,29.5 v2(25.4,25.7)
NetLED1_2: LED1.2 R22.2 | length 1.7
  Top Layer w0.25: R22.2 LED1.2
NetLED2_1: LED2.1 U6.8 | length 16.2
  Top Layer w0.2: U6.8 19.85,34.25 20.1,34 22.1,34 v2(25.9,30.2) ; v2(27.4,25.6) 27.65,25.35 LED2.1
  Bottom Layer w0.2: v2(25.9,30.2) 27.4,28.7 v2(27.4,25.6)
NetLED2_2: LED2.2 R23.2 | length 1.7
  Top Layer w0.25: R23.2 LED2.2
NetLED3_1: LED3.1 U6.36 | length 10.6
  Top Layer w0.2: v2(27.6,31.1) 28,31.1 28.65,31.75 U6.36 ; LED3.1 29.5,23.9 v2(29.5,27.3)
  Bottom Layer w0.2: v2(27.6,31.1) 29.6,29.1 29.6,27.2 v2(29.5,27.3)
NetLED3_2: LED3.2 R24.2 | length 1.7
  Top Layer w0.25: R24.2 LED3.2
"NetP1_power LED 1_2": PWR_LED1.2 R6_1.2 U2_1.5 | length 21.7
  Top Layer w0.5: R6_1.2 11.4,18.606 U2_1.5 11.4,15.1 12.9,13.6 12.9,8.6 12.6,8.3 11.8,8.3 10.7,7.2 10.7,2.84 PWR_LED1.2
"NetP1_power LED 2_2": PWR_LED2.2 R6_2.2 U2_2.5 | length 24.7
  Top Layer w0.5: PWR_LED2.2 13.74,5.5 20.1,5.5 21.2,6.6 21.2,8.2 23.5,10.5 23.5,13.8 22.4,14.9 U2_2.5 22.4,18.806 R6_2.2
NetP4_3: RPI.10 U6.51 UART.3 | length 21.7
  Top Layer w0.2: U6.51 26.75,41.15 v2(26.8,41.2)
  Bottom Layer w0.2: RPI.10 13.8,49.055 13.8,46.2 14.96,45.04 UART.3 18.06,41.4 26.4,41.4 26.6,41.2 v2(26.8,41.2)
NetP4_4: RPI.8 U6.52 UART.4 | length 24
  Top Layer w0.2: v2(26.1,40.8) 26.1,40.7 26.25,40.55 U6.52
  Bottom Layer w0.2: RPI.8 11.3,49.095 11.3,45.62 UART.4 12.3,44.38 12.3,43.5 15,40.8 v2(26.1,40.8)
NetP6_2: PWM2.2 U6.37 | length 42.5
  Top Layer w0.2: PWM2.2 3.6,13.6 7.9,13.6 9.7,15.4 10.379,15.4 10.73,15.751 10.73,19.452 10.85,19.572 10.85,19.881 11.769,20.8 13.6,20.8 15.5,22.7 19.6,22.7 20.2,23.3 20.2,24.146 20.854,24.8 22.3,24.8 22.7,25.2 v2(22.7,26.9) ; v2(27.8,32) 27.878,32 28.128,32.25 U6.37
  Bottom Layer w0.2: v2(22.7,26.9) 22.9,27.1 22.9,30.6 24.3,32 v2(27.8,32)
NetP7_2: PWM1.2 U6.38 | length 44.5
  Top Layer w0.2: v2(17.6,24.4) 17.6,24.3 17.9,24.6 18.922,24.6 18.972,24.55 19.428,24.55 19.478,24.6 20,24.6 v2(21,25.6) ; v2(27.8,32.7) 27.85,32.75 U6.38
  Bottom Layer w0.2: PWM1.2 -0.1,12.9 10.1,12.9 11.5,14.3 11.5,15.2 17.6,21.3 v2(17.6,24.4) ; v2(21,25.6) 21,29.3 24.4,32.7 v2(27.8,32.7)
NetP8_2: ENCODER2.2 U6.58 | length 23.7
  Top Layer w0.2: ENCODER2.2 4.54,37.46 5.9,38.82 v2(5.9,39) ; v2(23.1,37.1) 23.25,37.25 U6.58
  Bottom Layer w0.2: v2(5.9,39) 5.95,39.05 21.15,39.05 v2(23.1,37.1)
NetP8_3: ENCODER2.3 U6.59 | length 23.1
  Top Layer w0.2: v2(22.3,37.1) 22.75,37.55 U6.59
  Bottom Layer w0.2: ENCODER2.3 5.4,38.1 8.9,38.1 9.45,38.65 20.75,38.65 v2(22.3,37.1)
NetP9_2: ENKODER1.2 U6.16 | length 25.7
  Top Layer w0.2: v2(12.7,29.5) 13.8,28.4 v2(13.9,28.4) ; v2(17.4,27.6) 17.5,27.6 17.5,29.275 U6.16
  Bottom Layer w0.2: ENKODER1.2 0.25,36.25 5.95,36.25 v2(12.7,29.5) ; v2(13.9,28.4) 16.2,28.4 17,27.6 v2(17.4,27.6)
NetP9_3: ENKODER1.3 U6.17 | length 29.9
  Top Layer w0.2: ENKODER1.3 1,38.04 v2(1,35.7) ; v2(9.4,27.3) v2(10.8,25.9) ; v2(17.8,26.6) 18.8,26.6 20.25,28.05 U6.17
  Bottom Layer w0.2: v2(1,35.7) 1,35.496 9.196,27.3 v2(9.4,27.3) ; v2(10.8,25.9) 10.9,25.9 11.6,26.6 v2(17.8,26.6)
"NetQ1_power LED 1_1": Q1_1.1 R5_1.2 | length 2
  Top Layer w0.25: R5_1.2 10.345,23.27 Q1_1.1
"NetQ1_power LED 1_2": Q1_1.2 R4_1.2 U2_1.6 | length 6.9
  Top Layer w0.25: R4_1.2 6.895,20.975 8.825,20.975 9.4,20.4 9.4,19.455 Q1_1.2
  Top Layer w0.3: Q1_1.2 10.13,18.715 U2_1.6
"NetQ1_power LED 2_1": Q1_2.1 R5_2.2 | length 2
  Top Layer w0.25: R5_2.2 21.345,23.47 Q1_2.1
"NetQ1_power LED 2_2": Q1_2.2 R4_2.2 U2_2.6 | length 6.9
  Top Layer w0.25: R4_2.2 17.895,21.175 19.825,21.175 20.4,20.6 20.4,19.655 Q1_2.2
  Top Layer w0.3: Q1_2.2 21.13,18.915 U2_2.6
NetR1_1: R1.1 U1.6 U6.25 | length 32.9
  Top Layer w0.2: v2(23.8,24) 24.25,24.45 U6.25 ; v2(46,23.2) 47.38,23.2 R1.1 50.915,24.32 U1.6
  Bottom Layer w0.2: v2(23.8,24) 24.3,23.5 38.8,23.5 39.2,23.1 45.9,23.1 v2(46,23.2)
NetR2_1: R2.1 R3.2 U6.23 | length 41.2
  Top Layer w0.2: v2(22.3,24.2) 23.25,25.15 U6.23 ; v2(50.4,18.1) 51.1,18.1 R3.2 R2.1
  Bottom Layer w0.2: v2(22.3,24.2) 22.3,24.022 22.772,23.55 22.85,23.55 23.7,22.7 36.6,22.7 38.8,20.5 38.8,18.4 39.1,18.1 v2(50.4,18.1)
"NetR5_power LED 1_1": R5_1.1 U6.10 | length 16.5
  Top Layer w0.2: R5_1.1 8.395,27.095 v2(13,31.7) ; v2(16.9,33.4) 17.05,33.25 U6.10
  Bottom Layer w0.2: v2(13,31.7) 14.95,33.65 16.75,33.65 16.9,33.5 v2(16.9,33.4)
"NetR5_power LED 2_1": R5_2.1 U6.11 | length 21.1
  Top Layer w0.2: U6.11 18.4,32.675 17.649,32.675 17.274,32.3 14.2,32.3 13.9,32 13.9,31.6 11.4,29.1 11.4,25.5 13.1,23.8 R5_2.1
NetR16_2: R16.2 U6.46 | length 6
  Top Layer w0.25: U6.46 30.55,36.75 33.15,34.15 R16.2
NetR17_2: R17.2 U6.49 | length 10.8
  Top Layer w0.25: U6.49 29.675,39.525 v2(30,39.2) ; R17.2 v2(34.9,34)
  Bottom Layer w0.25: v2(30,39.2) 34.9,34.3 v2(34.9,34)
NetR20_1: R20.1 R21.2 SW1.2 | length 3.5
  Top Layer w0.2: SW1.2 14.38,27 R21.2 R20.1
NetT1_1: T1.1 U5.7 | length 6
  Top Layer w0.2: U5.7 50.5,29.5 50.8,29.2 55.07,29.2 T1.1
"NetU2_power LED 1_3": U2_1.3 U6.14 | length 29.7
  Top Layer w0.2: U2_1.3 10.13,14.43 v2(10.5,14.8) ; v2(10.3,19.8) 10.3,20.2 11,20.9 v2(11,23.7) ; U6.14 19.45,31.25 v2(20,31.8)
  Bottom Layer w0.2: v2(10.3,19.8) 10.5,19.6 v2(10.5,14.8) ; v2(11,23.7) 11,24.922 10.25,25.672 10.25,26.15 14.55,30.45 16.55,30.45 16.85,30.15 17.328,30.15 17.65,30.472 17.65,31.25 18.3,31.9 20,31.9 v2(20,31.8)
"NetU2_power LED 2_3": U2_2.3 U6.15 | length 21.9
  Top Layer w0.2: U6.15 20.05,30.75 20.2,30.6 20.2,29.8 18.6,28.2 v2(18.6,27.7) ; v2(21.1,14.2) 21.1,12.23 U2_2.3
  Bottom Layer w0.2: v2(18.6,27.7) 18.6,16.7 v2(21.1,14.2)
NRST: C24.1 R21.1 SWD.5 U6.7 | length 55.7
  Top Layer w0.2: R21.1 C24.1 17.1,28.85 v2(17.1,30.7) ; U6.7 20.25,34.75 v2(20.3,34.7) ; v2(35.7,34) 35.7,30.4 42,24.1 42,16.3 SWD.5
  Top Layer w0.25: v2(16,33.1) 16,33.313 16.662,33.975 16.671,33.975 17.446,34.75 U6.7
  Bottom Layer w0.2: v2(20.3,34.7) 24.5,34.7 29.7,39.9 30.078,39.9 35.7,34.278 v2(35.7,34)
  Bottom Layer w0.25: v2(16,33.1) 16,31.8 v2(17.1,30.7)
"OSC IN": C21.1 R19.2 U6.5 X1.1 | length 7.7
  Top Layer w0.2: X1.1 12.63,36.37 R19.2 16.87,35.75 U6.5
"OSC OUT": C22.1 R19.1 U6.6 X1.2 | length 8
  Top Layer w0.2: X1.2 13.42,34.62 C22.1 16.12,34.62 R19.1 16.75,35.25 U6.6
PWM1: U6.41 U7.23 | length 21.5
  Top Layer w0.2: U6.41 27.55,34.25 26.9,33.6 26.9,30.7 30.2,27.4 30.2,18 29.95,17.75 U7.23
PWM2: U6.42 U7.15 | length 21.2
  Top Layer w0.2: U6.42 30.55,34.75 30.8,34.5 30.8,31.7 32.4,30.1 32.4,25.9 35.15,23.15 U7.15
SWCLK: R17.1 SWD.2 | length 11.5
  Top Layer w0.25: R17.1 34.9,26.9 SWD.2
SWDIO: R16.1 SWD.4 | length 17.2
  Top Layer w0.25: R16.1 33.15,27.85 38.6,22.4 38.6,18.2 SWD.4
pads on no net: RPI.1 RPI.3 RPI.5 RPI.7 RPI.11 RPI.12 RPI.13 RPI.15 RPI.16 RPI.17 RPI.18 RPI.19 RPI.21 RPI.22 RPI.23 RPI.24 RPI.26 RPI.27 RPI.28 RPI.29 RPI.31 RPI.32 RPI.33 RPI.35 RPI.36 RPI.37 RPI.38 RPI.40 U4.1 U5.3 U6.2 U6.3 U6.4 U6.20 U6.21 U6.22 U6.26 U6.27 U6.28 U6.29 U6.39 U6.40 U6.43 U6.44 U6.45 U6.50 U6.53 U6.54 U6.55 U6.56 U6.57 U6.61 U6.62
copper on no net:
  other v3: 0,0 58,0 0,49.5 58,49.5

## Polygon pours and split planes (outlines as drawn)
NetC10_1 on Top Layer "Top Layer-No Net" (solid, pour order 0): 49,-0.4 50.3,-1.7 53.1,-1.7 54.4,-0.4 54.4,6.1 55.6,7.3 55.6,16.3 55.7,16.3 57.4,18 57.4,23 57,23.4 54.8,23.4 54.5,23.1 54.5,20.9 55.1,20.3 55.1,18.2 53.5,16.6 52.5,16.6 52.3,16.4 52.3,13 49,9.7
GND on Top Layer "Top Layer-No Net" (solid, pour order 2): -3.4,0.3 -3.4,15.6 cw(c-3,15.6) -3,16 1,16 ccw(c1,16.5) 1.5,16.5 1.5,32.5 ccw(c1,32.5) 1,33 -3,33 cw(c-3,33.4) -3.4,33.4 -3.4,49.3 cw(c0.1,49.3) 0.1,52.8 58.1,52.8 cw(c58.096,49.304) 61.592,49.3 61.592,0.3 cw(c58.096,0.296) 58.1,-3.2 0.1,-3.2 cw(c0.1,0.3)
DC_LINK on Top Layer "Top Layer-No Net" (solid, pour order 6): 57.3,23.7 54.5,23.7 52.9,25.3 52.9,26.6 53.5,27.2 57.3,27.2 58,26.5 58,24.135 57.465,23.6 57.3,23.6
GND on Bottom Layer "Top Layer-No Net" (solid, pour order 4): -3.4,0.3 -3.4,15.6 cw(c-3,15.6) -3,16 1,16 ccw(c1,16.5) 1.5,16.5 1.5,32.5 ccw(c1,32.5) 1,33 -3,33 cw(c-3,33.4) -3.4,33.4 -3.4,49.3 cw(c0.1,49.3) 0.1,52.8 58.1,52.8 cw(c58.096,49.304) 61.592,49.3 61.592,0.3 cw(c58.096,0.296) 58.1,-3.2 0.1,-3.2 cw(c0.1,0.3)

## Silkscreen, mask and mechanical layers (free items; w line width, h text height)
Mechanical 1:
  lines w0.1: -3.4,0.3 -3.4,15.5 -3.4,15.6 cw(c-3,15.6) -3,16 1,16 ccw(c1,16.5) 1.5,16.5 1.5,32.5 ccw(c1,32.5) 1,33 -3,33 cw(c-3,33.4) -3.4,33.4 -3.4,33.5 -3.4,49.3
  lines w0.254: -3.4,0.3 ccw(c0.1,0.3) 0.1,-3.2 58.1,-3.2 ccw(c58.096,0.296) 61.592,0.3 61.592,49.3 ccw(c58.096,49.304) 58.1,52.8 0.1,52.8 ccw(c0.1,49.3) -3.4,49.3

## Text inside footprints (layer, text, board x,y; h text height)
RPI: Top Overlay "39" at 55.143,47.219 h0.5; Top Overlay "40" at 55.143,49.759 h0.5; Top Overlay "2" at 2.311,49.759 h0.5; Top Overlay "1" at 2.311,47.219 h0.5